# Allegro board ASR6601CB_FEM_TB_V10_240315.brd
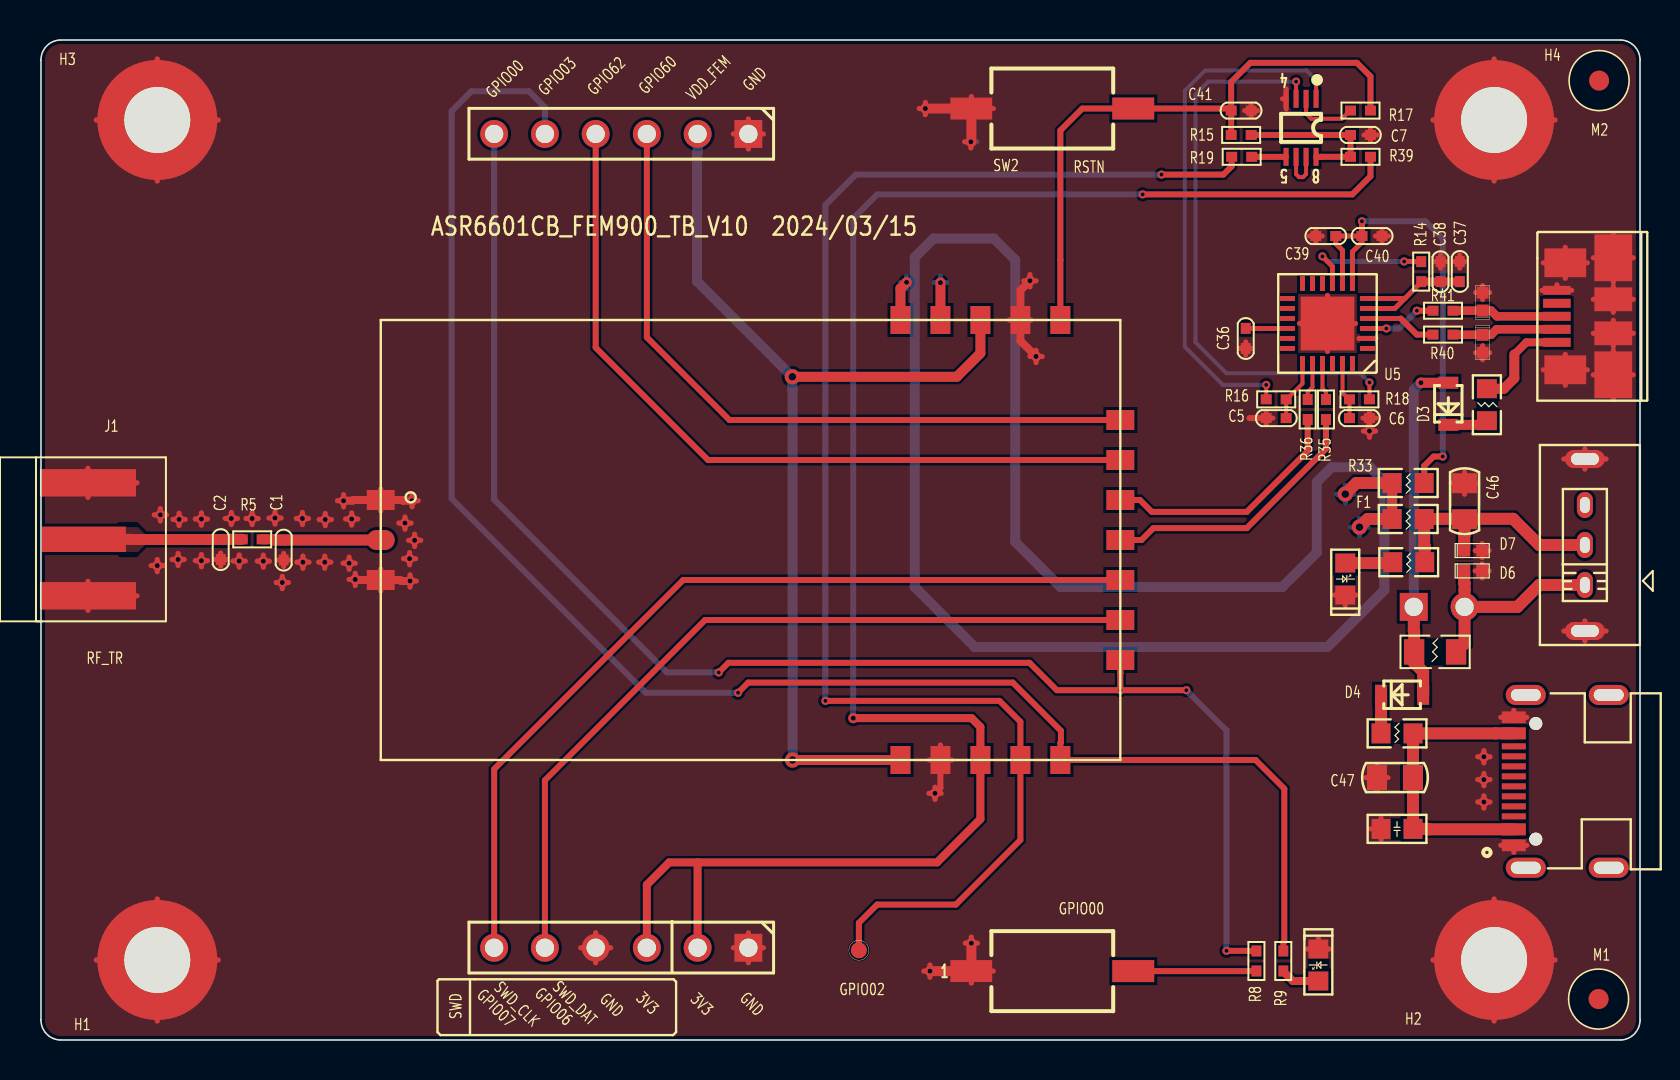
[diagram p0: board, top side]
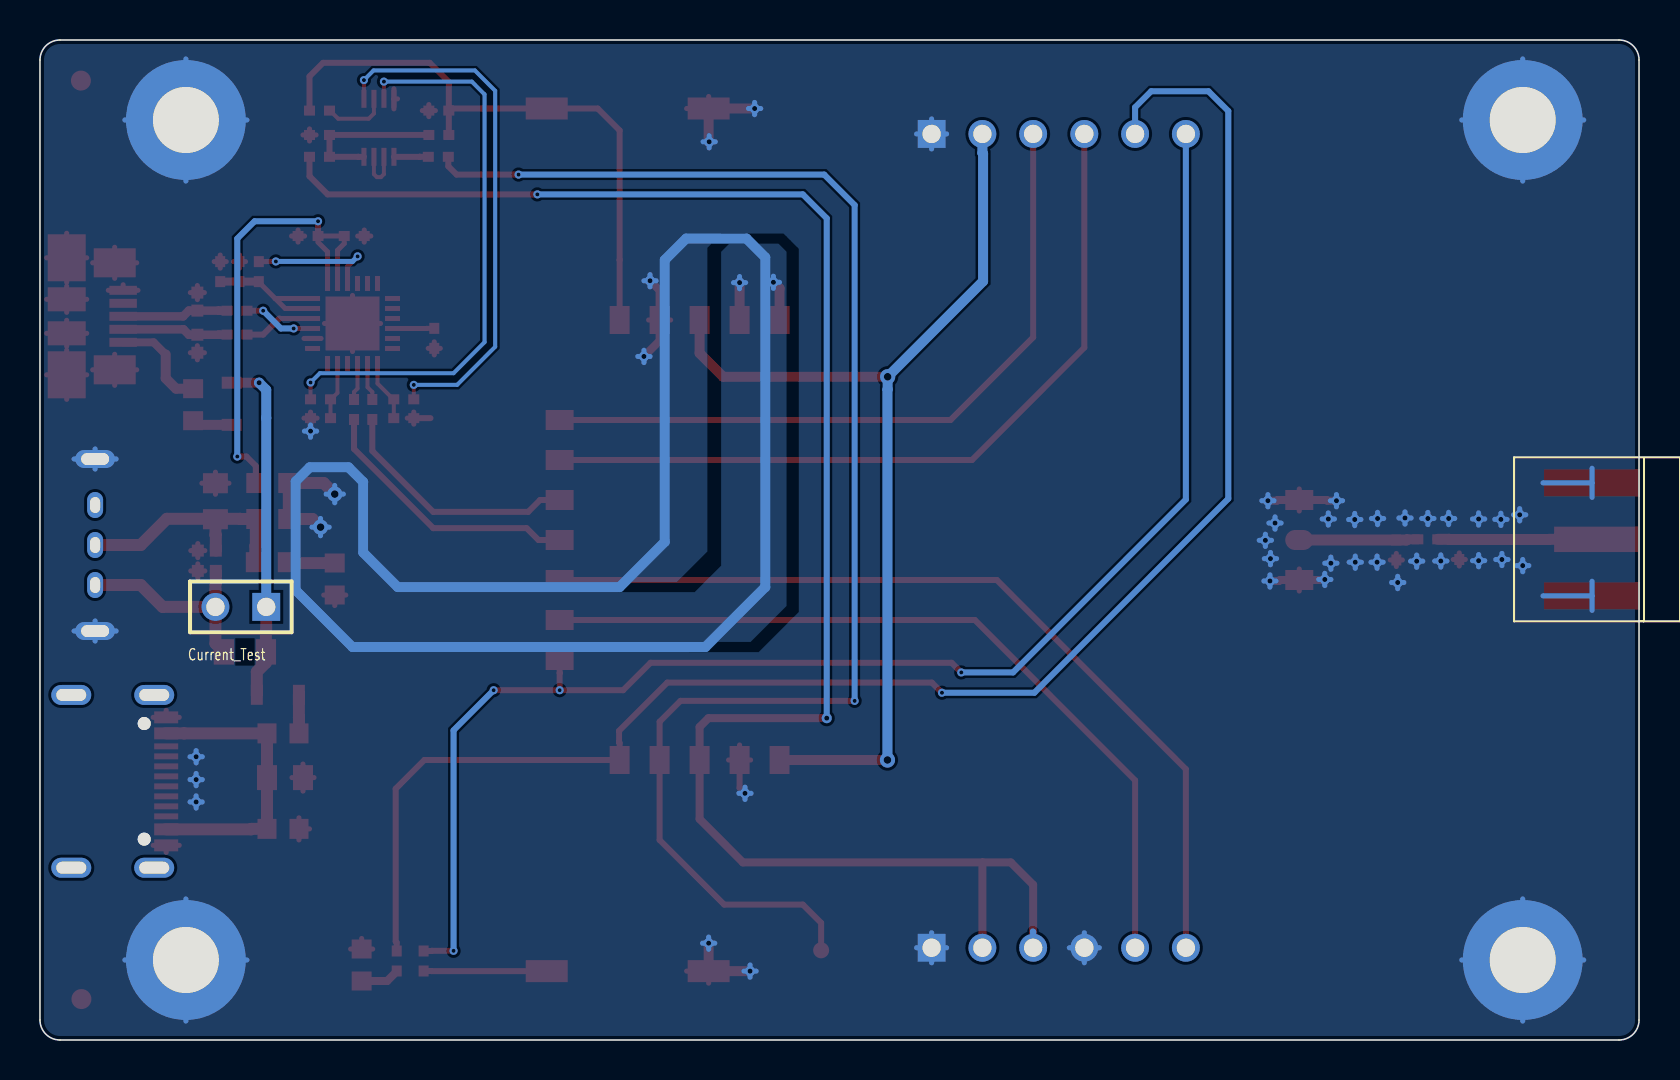
[diagram p1: board, bottom side, seen from below]

Outline 80 x 50 mm; copper layers: TOP, BOTTOM. Coordinates in mm from the lower left corner of the outline.
Outline path: 0,49 0,1 arc(0.29,0.29) 1,0 79,0 arc(79.71,0.29) 80,1 80,49 arc(79.71,49.71) 79,50 1,50 arc(0.29,49.71) 0,49

## Placement (name value [footprint] x y rotation side)
C1  NC  [C0402]  12.14 24.5 90 top
C2  NC  [C0402]  8.99 24.53 90 top
C5  0.1uF  [C0402]  61.8 31.09 180 top
C6  0.1uF  [C0402]  65.96 31.09 0 top
C7  0.1uF  [C0402]  66.01 45.25 0 top
C36  4.7uF  [C0402]  60.27 35.08 90 top
C37  0.1uF  [C0402]  70.98 38.42 270 top
C38  1uF  [C0402]  70.02 38.42 90 top
C39  0.1uF  [C0402]  64.28 40.2 180 top
C40  1uF  [C0402]  66.59 40.2 180 top
C41  10nF  [C0402]  60.05 46.47 0 top
C46  22uF  [C0805]  71.22 26.94 90 top
C47  47uF  [C0805]  67.74 13.12 180 top
C48  0.1uF  [C0603]  67.84 10.56 180 top
CN1  USB3_TYPEC  [CON_USB3_STC_SMD50P_12N_MM]  78.44 12.93 90 top
CN2  USB_Micro  [USB_MICRO_5N]  78.66 36.18 90 top
D1  ESD5301N  [DFN_100X60_2N_MM]  72.13 36.92 90 top
D2  ESD5301N  [DFN_100X60_2N_MM]  72.13 34.81 270 top
D3  1N5819WS  [SOD323]  70.41 31.81 270 top
D4  1N5819WS  [SOD323]  68.1 17.26 180 top
D5  LED_R  [D0603]  65.25 23.05 90 top
D6  ESD5411N  [DFN_100X60_2N_MM]  71.65 23.45 0 top
D7  ESD5411N  [DFN_100X60_2N_MM]  71.65 24.47 0 top
D8  LED_G  [D0603]  63.91 3.75 270 top
F1  FUSE/1000mA  [R0603]  68.4 26.05 180 top
F2  PTC FUSE  [R0805]  69.75 19.41 0 top
H1  D3.0,plated  [NC-PTH-3MM-6MM]  5.82 4 0 top
H2  D3.0,plated  [NC-PTH-3MM-6MM]  72.7 4 0 top
H3  D3.0,plated  [NC-PTH-3MM-6MM]  5.82 46 0 top
H4  D3.0,plated  [NC-PTH-3MM-6MM]  72.7 46 0 top
J1  SMA Edge Mount  [CON_SMA_1420X700_5N_MM]  2.15 25.03 180 top
J2  HDR  [ASR6601TB_2000X3600_20N_MM]  41 25 270 top
J4  HDR  [THT_SIP254P_6N_MM]  29.03 45.3 0 top
J5  HDR  [THT_SIP254P_6N_MM]  29.03 4.61 0 top
JP3  HDR2X1_THT  [THT_SIP254P_2N_MM]  69.95 21.66 90 bottom
M1  *TP_1MM  [FID-MARK-1MM]  77.93 2.05 0 top
M2  *TP_1MM  [FID-MARK-1MM]  77.95 47.97 0 top
R1  0.1R  [R0603]  72.34 31.76 270 top
R2  0.1R  [R0603]  67.84 15.33 0 top
R5  0R  [R0402]  10.57 25.03 180 top
R8  510R  [R0402]  62.15 3.95 270 top
R9  510R  [R0402]  60.81 3.95 270 top
R14  4.7K  [R0402]  69.05 38.42 270 top
R15  10K  [R0402]  60.05 45.25 180 top
R16  1K  [R0402]  61.8 32.03 0 top
R17  0R  [R0402]  66.01 46.47 0 top
R18  1K  [R0402]  65.96 32.03 180 top
R19  0R  [R0402]  60.07 44.16 0 top
R25  1K  [R0603]  68.43 23.89 180 top
R33  0R  [R0603]  68.4 27.85 180 top
R35  0R  [R0402]  64.29 31.53 270 top
R36  0R  [R0402]  63.37 31.53 270 top
R39  0R  [R0402]  66.01 44.16 0 top
R40  0R  [R0402]  70.14 35.27 180 top
R41  0R  [R0402]  70.14 36.46 180 top
SW1  SWK  [SW_SMT350X600_2N_MM]  50.6 3.44 0 top
SW2  SWK  [SW_SMT350X600_2N_MM]  50.6 46.57 0 top
SW4  Power Switch/DIP-5  [SW_SIP200P_860X470_5N_MM]  77.24 24.75 90 top
TP3  TP_3MM  [TP_SMD80C80_MM]  40.92 4.49 0 top
U5  CP2104  [QFN50P_400X400_24N_MM]  64.36 35.83 180 top
U8  NL37WZ14  [US50P_200X230_8N_MM]  63.04 45.61 180 top

## Library data of the parts
C1 C2 C5-C7 C36-C41 = RCL_CAP_NP
C46-C48 = CAP
CN1 = USB3_TYPEC_0
CN2 = CN_USB_MICRO_0
D1 D2 = TVS-UNI_1
D3 D4 = DIODE_1P2N
D5 = LED_2
D6 D7 = TVS-BI
D8 = LED_2P
F1 = FUSE
F2 = FUSE/SM_0
H1-H4 = HOLE
J1 = SMA_1
J2 = CN_6
J4 J5 = CN_7
JP3 = HEADER_2P_SIP
M1 M2 TP3 = TP_SMT
R1 R2 R5 R8 R9 R14-R19 R33 R35 R36 R39-R41 = RCL_RES
R25 = RES
SW1 SW2 = SW_B3S_0
SW4 = SW_3P_0
U5 = CP2104_0
U8 = NL37WZ14

## Footprints (pads in the part's own frame, mm; a bottom-side part is the same pattern mirrored in y, then rotated)
ASR6601TB_2000X3600_20N_MM
  rect 1x1.4 smd: 1(-2,-24) 3(2,-24) 9(6,13) 10(4,13) 11(2,13) 12(0,13) 13(-2,13) 14(-4,13) 15(-6,13)
  oval 1x1.4 smd: 2(0,-24)
  rect 1.4x1 smd: 4(11,2) 5(11,4) 6(11,6) 7(11,8) 8(11,10) 16(-11,10) 17(-11,8) 18(-11,6) 19(-11,4) 20(-11,2)
C0402
  rect 0.55x0.5 smd: 1(-0.5,0) 2(0.5,0)
C0603
  rect 0.95x1 smd: 1(-0.8,0) 2(0.8,0)
C0805
  rect 1x1.25 smd: 1(-0.9,0) 2(0.9,0)
CON_SMA_1420X700_5N_MM
  rect 4.2x1.27 smd: 1(0,0)
  rect 4.8x1.35 smd: 2(-0.2,2.825) 3(-0.2,2.825) 4(-0.2,-2.825) 5(-0.2,-2.825)
CON_USB3_STC_SMD50P_12N_MM
  oval 1x2 hole 0.6x1.5: (-4.32,4.15) (-4.32,0) (4.32,4.15) (4.32,0)
  round 0.65 hole 0.65 unplated: (-2.89,3.65) (2.89,3.65)
  rect 0.6x1.2 smd: A1B12(-3.2,4.75) A4B9(-2.4,4.75) B1A12(3.2,4.75) B4A9(2.4,4.75)
  rect 0.3x1.2 smd: A5(-1.25,4.75) A6(-0.25,4.75) A7(0.25,4.75) A8(1.25,4.75) B5(1.75,4.75) B6(0.75,4.75) B7(-0.75,4.75) B8(-1.75,4.75)
D0603
  rect 0.95x1 smd: 1(0.8,0) 2(-0.8,0)
DFN_100X60_2N_MM
  rect 0.6x0.6 smd: 1(-0.45,0) 2(0.45,0)
FID-MARK-1MM
  round 1 smd: 1(0,0)
NC-PTH-3MM-6MM
  round 6 hole 3.3: 1(0,0)
QFN50P_400X400_24N_MM
  rect 0.75x0.25 smd: 1(-2,1.25) 2(-2,0.75) 3(-2,0.25) 4(-2,-0.25) 5(-2,-0.75) 6(-2,-1.25) 13(2,-1.25) 14(2,-0.75) 15(2,-0.25) 16(2,0.25) 17(2,0.75) 18(2,1.25)
  rect 0.25x0.75 smd: 7(-1.25,-2) 8(-0.75,-2) 9(-0.25,-2) 10(0.25,-2) 11(0.75,-2) 12(1.25,-2) 19(1.25,2) 20(0.75,2) 21(0.25,2) 22(-0.25,2) 23(-0.75,2) 24(-1.25,2)
  rect 2.7x2.7 smd: 25(0,0)
R0402
  rect 0.55x0.5 smd: 1(-0.5,0) 2(0.5,0)
R0603
  rect 0.95x1 smd: 1(-0.8,0) 2(0.8,0)
R0805
  rect 1.016x1.27 smd: 1(-1.05,0) 2(1.05,0)
SOD323
  rect 0.6x1 smd: 1(1.053,0) 2(-1.053,0)
SW_SIP200P_860X470_5N_MM
  oval 1.3x0.8 hole 0.8x0.5: 1(-2,0) 2(0,0) 3(2,0)
  oval 0.9x2 hole 0.6x1.4: 4(-4.3,0) 5(4.3,0)
SW_SMT350X600_2N_MM
  rect 2.1x1.1 smd: 1(-4.05,0) 2(4.05,0)
THT_SIP254P_2N_MM
  rect 1.397x1.397 hole 0.914: 1(0,-1.27)
  round 1.397 hole 0.914: 2(0,1.27)
THT_SIP254P_6N_MM
  rect 1.397x1.397 hole 0.914: 1(6.36,0)
  round 1.397 hole 0.914: 2(3.82,0) 3(1.28,0) 4(-1.28,0) 5(-3.82,0) 6(-6.36,0)
TP_SMD80C80_MM
  round 0.8 smd: 1(0,0)
US50P_200X230_8N_MM
  rect 0.254x0.9 smd: 1(-0.75,-1.45) 2(-0.25,-1.45) 3(0.25,-1.45) 4(0.75,-1.45) 5(0.75,1.45) 6(0.25,1.45) 7(-0.25,1.45) 8(-0.75,1.45)
USB_MICRO_5N
  rect 0.45x1.38 smd: 1(-1.3,2.825) 2(-0.65,2.825) 3(0,2.825) 4(0.65,2.825) 5(1.3,2.825)
  rect 1.45x2.1 smd: 6(-2.675,2.402) 7(2.675,2.402)
  rect 2.35x1.9 smd: 8(-2.925,0) 9(2.925,0)
  rect 1.2x1.9 smd: 10(-0.85,0) 11(0.85,0)

## Nets
D3V3: C7.1 R15.1 R39.1 U8.8(VCC)
GND: C1.1 C2.1 C5.2 C6.2 C7.2 C36.1 C37.1 C38.2 C39.2 C40.1 C41.2 C46.2 C47.2 C48.2 CN1.A1B12(GND#A1B12) CN1.B1A12(GND#B1A12) CN2.5(GND#5) CN2.6(GND#6) CN2.7(GND#7) CN2.8(GND#8) CN2.9(GND#9) CN2.10(GND#10) CN2.11(GND#11) D1.2 D2.2 D5.2(C) D6.2 D7.2 D8.2(CATHODE) H1.1 H2.1 H3.1 H4.1 J1.2 J1.3 J1.4 J1.5 J2.1 J2.3 J2.5 J2.17 J4.1 J5.1 J5.4 SW1.1 SW2.1 SW4.4(GND#4) SW4.5(GND#5) U5.2(GND) U5.25(TP) U8.4(GND)
VBAT_IN: F1.2 J2.19 J2.20 R33.2
VBUS: C47.1 C48.1 CN1.A4B9(VBUS#A4B9) CN1.B4A9(VBUS#B4A9) R2.2
VBUS1: CN2.1(VBUS) R1.1
VCC_3V3: J2.6 J5.2 J5.3 R39.2
VDD_FEM: J2.4 J2.18 J4.2
DTR: C6.1 R18.2 U5.23(DTR)
GPIO00: J2.9 J4.6 R9.1
GPIO02: J2.7 R19.1 TP3.1(TP)
GPIO03: J2.8 J4.5 R8.1
GPIO06: J2.10 J5.5
GPIO07: J2.11 J5.6
GPIO16: J2.12 R35.2
GPIO17: J2.13 R36.2
GPIO60: J2.15 J4.3
GPIO62: J2.14 J4.4
RF_TR: C1.2 J2.2 R5.1
RSTN: C41.1 J2.16 R15.2 R17.2 SW2.2
RTS: C5.1 R16.2 U5.19(RTS)
UART_3.4V: C37.2 C38.1 R14.2 U5.5(VIO) U5.6(VDD)
UART_DM: R40.2 U5.4(D-)
UART_DP: R41.2 U5.3(D+)
USB1_5V0: D3.1(A) R1.2
USB2_5V0: D4.1(A) R2.1
USB_5V0: D6.1 F2.2 JP3.2 SW4.1(SW_1)
N16724515: C39.1 C40.2 R33.1 U5.7(REGIN) U5.8(VBUS)
N16724567: C36.2 U5.16(VPP)
N16724579: R14.1 U5.9(RST#)
N16724609: R35.1 U5.21(TXD)
N16724613: R36.1 U5.20(RXD)
N16787728: C46.1 D7.1 F1.1 R25.1 SW4.2(SW_2)
N16787748: D5.1(A) R25.2
N16834216: R16.1 U8.1(INA1)
N16834221: R18.1 U8.3(INA2)
N16834235: U8.6(INA3) U8.7(OUTY1N)
N16834244: R19.2 U8.5(OUTY2N)
N16834246: R17.1 U8.2(OUTY3N)
N16861799: CN2.2(D-) D2.1 R40.1
N16864731: D3.2(K) D4.2(K) F2.1 JP3.1
N16868673: R9.2 SW1.2
N16868745: D8.1(ANODE) R8.2
N16873648: C2.2 J1.1(RF) R5.2
N16877072: CN2.3(D+) D1.1 R41.1

Pads without a net: CN1 A5 A6 A7 A8 B5 B6 B7 B8; CN2 4; M1 1; M2 1; SW4 3; U5 1 10 11 12 13 14 15 17 18 22 24

## Via types
v1: diameter 0.508, hole 0.254, TOP to BOTTOM, 40 vias
v2: diameter 0.762, hole 0.381, TOP to BOTTOM, 4 vias
v3: diameter 0.406, hole 0.203, TOP to BOTTOM, 18 vias

## Routing (per net, layer and track width the routed paths; a pad name or vN(x,y) marks a point on that pad's centre or on a via; arc(x,y) is an arc through that point)
D3V3: length 7.8
  TOP w0.3: U8.8 64.07,44.16 64.07,44.16 R39.1 C7.1 R15.1
GND: length 323.2
  TOP w0.254: C5.2 61.62,31.09 ; C5.2 61.3,31.39 ; C5.2 61.3,30.79 ; v1(72.19,11.9) 72.19,12.21 ; v1(72.19,11.9) 71.88,11.9 ; v1(72.19,11.9) 72.19,11.6 ; v1(72.19,11.9) 72.49,11.9 ; SW4.4 77.24,20.95 ; SW4.4 77.24,19.95 ; SW4.4 78.29,20.45 ; SW4.4 76.19,20.45 ; 76.19,29.05 SW4.5 ; SW4.5 78.29,29.05 ; SW4.5 77.24,29.55 ; SW4.5 77.24,28.55 ; 18.47,22.65 v1(18.47,22.95) ; v1(18.47,22.95) 18.77,22.95 ; v1(18.47,22.95) 18.47,23.26 ; 69.72,38.92 C38.2 ; C38.2 70.02,39.25 ; C38.2 70.02,38.59 ; C38.2 70.32,38.92 ; 72.1,23.1 D6.2 ; D6.2 72.45,23.45 ; D6.2 71.75,23.45 ; D6.2 72.1,23.81 ; 18.21,25.54 v1(18.21,25.85) ; v1(18.21,25.85) 18.52,25.85 ; v1(18.21,25.85) 18.21,26.15 ; v1(18.21,25.85) 17.91,25.85 ; 64.7,22.25 D5.2 ; D5.2 65.8,22.25 ; D5.2 65.25,21.72 ; v1(44.73,12.33) 44.73,12.64 ; v1(44.73,12.33) 44.42,12.33 ; v1(44.73,12.33) 44.73,12.03 ; v1(44.73,12.33) 45.03,12.33 ; 72.7,42.95 H4.1 ; H4.1 72.7,49.05 ; H4.1 69.65,46 ; H4.1 75.75,46 ; v1(18.44,24.07) 18.44,24.37 ; v1(18.44,24.07) 18.44,23.76 ; v1(18.44,24.07) 18.75,24.07 ; v1(18.44,24.07) 18.14,24.07 ; v1(15.54,26.05) 15.54,26.35 ; v1(15.54,26.05) 15.85,26.05 ; v1(15.54,26.05) 15.54,25.74 ; v1(15.54,26.05) 15.24,26.05 ; 71.88,14.16 v1(72.19,14.16) ; v1(72.19,14.16) 72.19,14.47 ; v1(72.19,14.16) 72.19,13.86 ; v1(72.19,14.16) 72.49,14.16 ; C6.2 66.46,31.39 ; C6.2 66.14,31.09 ; C6.2 66.79,31.09 ; 2.35,27.13 J1.4 ; J1.4 4.8,27.86 ; J1.4 2.35,28.58 ; 27,4.61 J5.4 ; J5.4 27.75,3.86 ; J5.4 28.5,4.61 ; J5.4 27.75,5.36 ; 66.16,30.44 v1(66.46,30.44) ; v1(66.46,30.44) 66.77,30.44 ; v1(66.46,30.44) 66.46,30.14 ; 46.55,2.84 SW1.1 47.65,3.44 ; C36.1 60.27,34.91 ; C36.1 60.27,34.26 ; C36.1 59.97,34.58 ; C36.1 60.58,34.58 ; v1(49.78,34.18) 50.09,34.18 ; v1(49.78,34.18) 49.78,34.48 ; v1(49.78,34.18) 49.78,33.87 ; v1(49.78,34.18) 49.48,34.18 ; 70.55,27.84 C46.2 ; C46.2 71.22,27.29 ; C46.2 71.22,28.39 ; C46.2 71.9,27.84 ; 10.26,26.07 v1(10.57,26.07) ; v1(10.57,26.07) 10.57,26.38 ; v1(10.57,26.07) 10.57,25.77 ; v1(10.57,26.07) 10.87,26.07 ; 14.22,25.72 v1(14.22,26.02) ; v1(14.22,26.02) 13.92,26.02 ; v1(14.22,26.02) 14.22,26.33 ; v1(14.22,26.02) 14.53,26.02 ; 72.13,34.01 D2.2 ; D2.2 72.48,34.36 ; D2.2 72.13,34.71 ; D2.2 71.77,34.36 ; 15.14,26.66 v1(15.14,26.96) ; v1(15.14,26.96) 14.83,26.96 ; v1(15.14,26.96) 15.14,27.27 ; 5.82,42.95 H3.1 ; H3.1 5.82,49.05 ; H3.1 2.77,46 ; H3.1 8.87,46 ; 12.07,22.57 v1(12.07,22.87) ; v1(12.07,22.87) 11.77,22.87 ; v1(12.07,22.87) 12.07,23.18 ; v1(12.07,22.87) 12.38,22.87 ; 6.56,24.02 v1(6.86,24.02) ; v1(6.86,24.02) 7.17,24.02 ; v1(6.86,24.02) 6.86,24.33 ; v1(6.86,24.02) 6.86,23.72 ; v1(13.11,23.89) 13.11,24.2 ; v1(13.11,23.89) 13.41,23.89 ; v1(13.11,23.89) 12.8,23.89 ; v1(13.11,23.89) 13.11,23.59 ; 11.13,23.64 v1(11.13,23.94) ; v1(11.13,23.94) 11.43,23.94 ; v1(11.13,23.94) 10.82,23.94 ; v1(11.13,23.94) 11.13,24.25 ; J2.5 45,14.75 ; J2.5 44.45,14 ; J2.5 45.55,14 ; 65.94,35.08 U5.2 66.79,35.08 ; H1.1 8.87,4 ; H1.1 2.77,4 ; H1.1 5.82,0.95 ; H1.1 5.82,7.05 ; 11.71,25.8 v1(11.71,26.1) ; v1(11.71,26.1) 11.4,26.1 ; v1(11.71,26.1) 12.01,26.1 ; v1(11.71,26.1) 11.71,26.41 ; 76.26,32.73 CN2.6 ; CN2.6 77.36,33.51 ; CN2.6 76.26,34.29 ; CN2.6 75.16,33.51 ; 72.13,37.02 D1.2 ; D1.2 71.77,37.37 ; D1.2 72.13,37.72 ; D1.2 72.48,37.37 ; v1(8.03,23.97) 8.33,23.97 ; v1(8.03,23.97) 7.72,23.97 ; v1(8.03,23.97) 8.03,24.27 ; v1(8.03,23.97) 8.03,23.66 ; 64.36,34.43 U5.25 ; U5.25 62.96,35.83 ; U5.25 65.76,35.83 ; U5.25 64.36,37.23 ; 46.22,44.91 v1(46.52,44.91) ; v1(46.52,44.91) 46.52,45.22 ; v1(46.52,44.91) 46.52,44.61 ; v1(72.19,13.02) 72.49,13.02 ; v1(72.19,13.02) 72.19,12.71 ; v1(72.19,13.02) 71.88,13.02 ; v1(72.19,13.02) 72.19,13.32 ; D7.2 72.45,24.47 ; D7.2 72.1,24.82 ; D7.2 71.75,24.47 ; D7.2 72.1,24.12 ; C41.2 60.55,46.77 ; C41.2 60.55,46.17 ; C41.2 60.87,46.47 ; C41.2 60.22,46.47 ; C1.1 12.44,24 ; C1.1 12.14,23.67 ; C1.1 11.84,24 ; C1.1 12.14,24.33 ; 7.72,26.05 v1(8.03,26.05) ; v1(8.03,26.05) 8.03,26.35 ; v1(8.03,26.05) 8.03,25.74 ; v1(8.03,26.05) 8.33,26.05 ; J5.1 35.39,5.36 ; J5.1 36.14,4.61 ; J5.1 34.64,4.61 ; J5.1 35.39,3.86 ; CN2.7 77.36,38.86 ; CN2.7 76.26,39.64 ; CN2.7 75.16,38.86 ; CN2.7 76.26,38.08 ; D8.2 64.46,4.55 ; D8.2 63.91,5.07 ; D8.2 63.36,4.55 ; 17,26.45 J2.1 17,27.55 ; 62.29,46.56 U8.4 ; U8.4 62.29,47.56 ; U8.4 62.11,47.06 ; C7.2 66.51,45.55 ; C7.2 66.84,45.25 ; C7.2 66.51,44.95 ; C7.2 66.19,45.25 ; CN2.9 78.66,40.34 ; CN2.9 79.66,39.11 ; CN2.9 77.66,39.11 ; CN2.9 78.66,37.88 ; 77.66,37.03 CN2.11 ; CN2.11 78.66,37.69 ; CN2.11 78.66,36.38 ; CN2.11 79.66,37.03 ; v1(15.72,23.03) 15.72,23.33 ; v1(15.72,23.03) 15.72,22.72 ; v1(15.72,23.03) 16.03,23.03 ; v1(15.72,23.03) 15.42,23.03 ; v1(14.2,23.89) 14.2,24.2 ; v1(14.2,23.89) 13.89,23.89 ; v1(14.2,23.89) 14.2,23.59 ; v1(14.2,23.89) 14.5,23.89 ; v1(13.08,26.07) 13.08,26.38 ; v1(13.08,26.07) 12.78,26.07 ; v1(13.08,26.07) 13.39,26.07 ; v1(13.08,26.07) 13.08,25.77 ; 67.09,39.9 C40.1 ; C40.1 67.41,40.2 ; C40.1 66.76,40.2 ; C40.1 67.09,40.5 ; 72.7,0.95 H2.1 ; H2.1 69.65,4 ; H2.1 72.7,7.05 ; H2.1 75.75,4 ; v1(5.82,23.72) 5.82,24.02 ; v1(5.82,23.72) 5.51,23.72 ; v1(5.82,23.72) 5.82,23.41 ; v1(5.82,23.72) 6.12,23.72 ; v1(5.97,26.26) 5.97,26.57 ; v1(5.97,26.26) 6.28,26.26 ; v1(5.97,26.26) 5.97,25.95 ; v1(5.97,26.26) 5.67,26.26 ; 15.11,23.84 v1(15.42,23.84) ; v1(15.42,23.84) 15.72,23.84 ; v1(15.42,23.84) 15.42,23.53 ; v1(15.42,23.84) 15.42,24.14 ; 78.66,32.03 CN2.8 ; CN2.8 79.66,33.26 ; CN2.8 78.66,34.48 ; CN2.8 77.66,33.26 ; 73.03,9.73 CN1.A1B12 ; CN1.A1B12 74.34,9.73 ; CN1.A1B12 73.69,9.38 ; v1(46.55,4.84) 46.85,4.84 ; v1(46.55,4.84) 46.24,4.84 ; v1(46.55,4.84) 46.55,5.15 ; CN2.5 76.58,37.48 ; CN2.5 75.84,37.76 ; CN2.5 75.1,37.48 ; 8.99,23.7 C2.1 ; C2.1 8.99,24.35 ; C2.1 8.69,24.03 ; C2.1 9.29,24.03 ; v1(18.69,24.98) 19,24.98 ; v1(18.69,24.98) 18.69,24.68 ; v1(18.69,24.98) 18.39,24.98 ; v1(18.69,24.98) 18.69,25.29 ; v1(6.91,26.03) 7.22,26.03 ; v1(6.91,26.03) 6.61,26.03 ; v1(6.91,26.03) 6.91,25.73 ; v1(6.91,26.03) 6.91,26.34 ; v1(9.53,26.07) 9.83,26.07 ; v1(9.53,26.07) 9.53,26.38 ; v1(9.53,26.07) 9.53,25.77 ; v1(9.53,26.07) 9.22,26.07 ; J4.1 36.14,45.3 ; J4.1 35.39,44.55 ; J4.1 35.39,46.05 ; J4.1 34.64,45.3 ; 9.92,23.64 v1(9.92,23.95) ; v1(9.92,23.95) 9.92,24.25 ; v1(9.92,23.95) 9.61,23.95 ; v1(9.92,23.95) 10.22,23.95 ; v1(44.25,46.57) 44.25,46.88 ; v1(44.25,46.57) 44.25,46.27 ; v1(44.25,46.57) 43.94,46.57 ; 63.45,40.2 C39.2 ; C39.2 63.78,39.9 ; C39.2 64.1,40.2 ; C39.2 63.78,40.5 ; CN2.10 78.66,35.99 ; CN2.10 77.66,35.33 ; CN2.10 79.66,35.33 ; CN2.10 78.66,34.68 ; 66.84,12.45 C47.2 ; C47.2 66.29,13.12 ; C47.2 67.39,13.12 ; C47.2 66.84,13.8 ; 44.48,3.14 v1(44.48,3.44) ; v1(44.48,3.44) 44.17,3.44 ; v1(44.48,3.44) 44.48,3.75 ; v1(18.57,26.96) 18.87,26.96 ; v1(18.57,26.96) 18.57,27.27 ; v1(18.57,26.96) 18.57,26.66 ; 70.68,38.92 C37.1 ; C37.1 70.98,39.25 ; C37.1 71.28,38.92 ; C37.1 70.98,38.59 ; v1(49.48,37.96) 49.48,38.27 ; v1(49.48,37.96) 49.17,37.96 ; v1(49.48,37.96) 49.78,37.96 ; v1(49.48,37.96) 49.48,37.66 ; 2.35,21.48 2.35,22.21 ; 2.35,22.21 2.35,22.93 ; 2.35,22.21 4.8,22.21 ; CN1.B1A12 73.69,16.48 ; CN1.B1A12 73.03,16.13 ; CN1.B1A12 74.34,16.13 ; 49.55,36 J2.17 48.45,36 ; 67.04,10 C48.2 ; C48.2 67.04,11.11 ; C48.2 66.52,10.56 ; 47.65,46.57 SW2.1 46.55,47.17 ; 17,23.55 J2.3 17,22.45
  TOP w0.3: v1(44.73,12.33) 45,12.6 J2.5 ; 60.46,31.09 C5.2 ; v1(66.46,30.44) C6.2
  TOP w0.4: v1(15.14,26.96) 15.59,26.96 15.63,27 J2.1 18.08,27 18.11,26.96 v1(18.57,26.96) ; v1(49.48,37.96) 49,37.48 J2.17 49,34.96 v1(49.78,34.18) ; v1(18.47,22.95) 18.01,22.95 17.96,23 J2.3 15.75,23 v1(15.72,23.03)
  TOP w0.5: v1(44.48,3.44) SW1.1 v1(46.55,4.84) ; v1(46.52,44.91) 46.55,44.91 SW2.1 v1(44.25,46.57)
  BOTTOM w0.254: v1(15.72,23.03) 15.72,23.33 ; v1(15.72,23.03) 15.42,23.03 ; v1(15.72,23.03) 15.72,22.72 ; v1(15.72,23.03) 16.03,23.03 ; v1(46.55,4.84) 46.55,5.15 ; v1(46.55,4.84) 46.24,4.84 ; v1(46.55,4.84) 46.55,4.54 ; v1(46.55,4.84) 46.85,4.84 ; 12.78,26.07 v1(13.08,26.07) ; v1(13.08,26.07) 13.08,26.38 ; v1(13.08,26.07) 13.39,26.07 ; v1(13.08,26.07) 13.08,25.77 ; 49.48,34.18 v1(49.78,34.18) ; v1(49.78,34.18) 49.78,33.87 ; v1(49.78,34.18) 50.09,34.18 ; v1(49.78,34.18) 49.78,34.48 ; v1(14.2,23.89) 14.2,24.2 ; v1(14.2,23.89) 14.2,23.59 ; v1(14.2,23.89) 14.5,23.89 ; v1(14.2,23.89) 13.89,23.89 ; 11.4,26.1 v1(11.71,26.1) ; v1(11.71,26.1) 12.01,26.1 ; v1(11.71,26.1) 11.71,25.8 ; v1(11.71,26.1) 11.71,26.41 ; v1(44.73,12.33) 45.03,12.33 ; v1(44.73,12.33) 44.73,12.03 ; v1(44.73,12.33) 44.42,12.33 ; v1(44.73,12.33) 44.73,12.64 ; v1(72.19,13.02) 72.19,13.32 ; v1(72.19,13.02) 72.49,13.02 ; v1(72.19,13.02) 71.88,13.02 ; v1(72.19,13.02) 72.19,12.71 ; 49.48,37.66 v1(49.48,37.96) ; v1(49.48,37.96) 49.17,37.96 ; v1(49.48,37.96) 49.48,38.27 ; v1(49.48,37.96) 49.78,37.96 ; 6.61,26.03 v1(6.91,26.03) ; v1(6.91,26.03) 6.91,26.34 ; v1(6.91,26.03) 7.22,26.03 ; v1(6.91,26.03) 6.91,25.73 ; 10.26,26.07 v1(10.57,26.07) ; v1(10.57,26.07) 10.57,25.77 ; v1(10.57,26.07) 10.87,26.07 ; v1(10.57,26.07) 10.57,26.38 ; v1(9.53,26.07) 9.53,26.38 ; v1(9.53,26.07) 9.53,25.77 ; v1(9.53,26.07) 9.22,26.07 ; v1(9.53,26.07) 9.83,26.07 ; 2.35,22.21 2.35,22.93 ; 2.35,22.21 4.8,22.21 ; 2.35,22.21 2.35,21.48 ; 35.39,3.86 J5.1 ; J5.1 35.39,5.36 ; J5.1 36.14,4.61 ; J5.1 34.64,4.61 ; 12.8,23.89 v1(13.11,23.89) ; v1(13.11,23.89) 13.11,24.2 ; v1(13.11,23.89) 13.41,23.89 ; v1(13.11,23.89) 13.11,23.59 ; 8.03,23.66 v1(8.03,23.97) ; v1(8.03,23.97) 8.03,24.27 ; v1(8.03,23.97) 8.33,23.97 ; v1(8.03,23.97) 7.72,23.97 ; 34.64,45.3 J4.1 ; J4.1 35.39,44.55 ; J4.1 36.14,45.3 ; J4.1 35.39,46.05 ; v1(15.14,26.96) 15.14,27.27 ; v1(15.14,26.96) 15.14,26.66 ; v1(15.14,26.96) 14.83,26.96 ; v1(15.14,26.96) 15.44,26.96 ; 69.65,4 H2.1 ; H2.1 72.7,0.95 ; H2.1 72.7,7.05 ; H2.1 75.75,4 ; 17.91,25.85 v1(18.21,25.85) ; v1(18.21,25.85) 18.21,25.54 ; v1(18.21,25.85) 18.21,26.15 ; v1(18.21,25.85) 18.52,25.85 ; 71.88,14.16 v1(72.19,14.16) ; v1(72.19,14.16) 72.19,13.86 ; v1(72.19,14.16) 72.49,14.16 ; v1(72.19,14.16) 72.19,14.47 ; v1(8.03,26.05) 8.03,26.35 ; v1(8.03,26.05) 8.33,26.05 ; v1(8.03,26.05) 8.03,25.74 ; v1(8.03,26.05) 7.72,26.05 ; 5.97,25.95 v1(5.97,26.26) ; v1(5.97,26.26) 5.67,26.26 ; v1(5.97,26.26) 5.97,26.57 ; v1(5.97,26.26) 6.28,26.26 ; 76.19,29.05 SW4.5 ; SW4.5 77.24,29.55 ; SW4.5 77.24,28.55 ; SW4.5 78.29,29.05 ; v1(15.54,26.05) 15.54,26.35 ; v1(15.54,26.05) 15.54,25.74 ; v1(15.54,26.05) 15.85,26.05 ; v1(15.54,26.05) 15.24,26.05 ; H4.1 72.7,49.05 ; H4.1 72.7,42.95 ; H4.1 75.75,46 ; H4.1 69.65,46 ; 14.22,25.72 v1(14.22,26.02) ; v1(14.22,26.02) 13.92,26.02 ; v1(14.22,26.02) 14.53,26.02 ; v1(14.22,26.02) 14.22,26.33 ; v1(5.82,23.72) 6.12,23.72 ; v1(5.82,23.72) 5.82,24.02 ; v1(5.82,23.72) 5.51,23.72 ; v1(5.82,23.72) 5.82,23.41 ; v1(11.13,23.94) 11.13,24.25 ; v1(11.13,23.94) 11.13,23.64 ; v1(11.13,23.94) 10.82,23.94 ; v1(11.13,23.94) 11.43,23.94 ; 9.92,23.64 v1(9.92,23.95) ; v1(9.92,23.95) 9.92,24.25 ; v1(9.92,23.95) 9.61,23.95 ; v1(9.92,23.95) 10.22,23.95 ; 18.57,26.66 v1(18.57,26.96) ; v1(18.57,26.96) 18.87,26.96 ; v1(18.57,26.96) 18.26,26.96 ; v1(18.57,26.96) 18.57,27.27 ; J1.4 2.35,28.58 ; J1.4 2.35,27.13 ; J1.4 4.8,27.86 ; 66.46,30.14 v1(66.46,30.44) ; v1(66.46,30.44) 66.16,30.44 ; v1(66.46,30.44) 66.77,30.44 ; v1(66.46,30.44) 66.46,30.75 ; 5.82,42.95 H3.1 ; H3.1 8.87,46 ; H3.1 2.77,46 ; H3.1 5.82,49.05 ; 44.25,46.27 v1(44.25,46.57) ; v1(44.25,46.57) 43.94,46.57 ; v1(44.25,46.57) 44.55,46.57 ; v1(44.25,46.57) 44.25,46.88 ; 15.11,23.84 v1(15.42,23.84) ; v1(15.42,23.84) 15.72,23.84 ; v1(15.42,23.84) 15.42,24.14 ; v1(15.42,23.84) 15.42,23.53 ; 5.82,0.95 H1.1 ; H1.1 5.82,7.05 ; H1.1 8.87,4 ; H1.1 2.77,4 ; 77.24,19.95 SW4.4 ; SW4.4 77.24,20.95 ; SW4.4 78.29,20.45 ; SW4.4 76.19,20.45 ; v1(44.48,3.44) 44.78,3.44 ; v1(44.48,3.44) 44.48,3.14 ; v1(44.48,3.44) 44.17,3.44 ; v1(44.48,3.44) 44.48,3.75 ; J5.4 27.75,5.36 ; J5.4 27,4.61 ; J5.4 28.5,4.61 ; J5.4 27.75,3.86 ; 18.16,22.95 v1(18.47,22.95) ; v1(18.47,22.95) 18.47,23.26 ; v1(18.47,22.95) 18.47,22.65 ; v1(18.47,22.95) 18.77,22.95 ; v1(46.52,44.91) 46.52,45.22 ; v1(46.52,44.91) 46.83,44.91 ; v1(46.52,44.91) 46.22,44.91 ; v1(46.52,44.91) 46.52,44.61 ; 18.69,24.68 v1(18.69,24.98) ; v1(18.69,24.98) 19,24.98 ; v1(18.69,24.98) 18.39,24.98 ; v1(18.69,24.98) 18.69,25.29 ; 18.14,24.07 v1(18.44,24.07) ; v1(18.44,24.07) 18.44,23.76 ; v1(18.44,24.07) 18.44,24.37 ; v1(18.44,24.07) 18.75,24.07 ; 11.77,22.87 v1(12.07,22.87) ; v1(12.07,22.87) 12.38,22.87 ; v1(12.07,22.87) 12.07,23.18 ; v1(12.07,22.87) 12.07,22.57 ; v1(6.86,24.02) 6.86,24.33 ; v1(6.86,24.02) 6.56,24.02 ; v1(6.86,24.02) 6.86,23.72 ; v1(6.86,24.02) 7.17,24.02 ; v1(72.19,11.9) 72.19,12.21 ; v1(72.19,11.9) 71.88,11.9 ; v1(72.19,11.9) 72.49,11.9 ; v1(72.19,11.9) 72.19,11.6
VBAT_IN: length 16
  TOP w0.5: J2.20 43,37.58 v1(43.31,37.89) ; R33.2 F1.2 ; J2.19 v1(45,37.87)
  TOP w0.6: R33.2 65.81,27.85 v2(65.25,27.29) ; v2(65.96,25.64) 66.37,26.05 F1.2
  BOTTOM w0.254: 65.96,25.21 v2(65.96,25.64) ; v2(65.96,25.64) 65.53,25.64 ; v2(65.96,25.64) 65.96,26.08 ; v2(65.96,25.64) 66.4,25.64 ; v1(45,37.87) 45.3,37.87 ; v1(45,37.87) 44.7,37.87 ; v1(45,37.87) 45,38.17 ; v1(45,37.87) 45,37.56 ; 43.31,37.58 v1(43.31,37.89) ; v1(43.31,37.89) 43,37.89 ; v1(43.31,37.89) 43.61,37.89 ; v1(43.31,37.89) 43.31,38.19 ; v2(65.25,27.29) 65.68,27.29 ; v2(65.25,27.29) 64.82,27.29 ; v2(65.25,27.29) 65.25,27.73 ; v2(65.25,27.29) 65.25,26.86
VBUS: length 14.9
  TOP w0.6: CN1.A4B9 69.44,10.53 69.42,10.56 C48.1 68.64,12.19 68.64,12.2 C47.1 68.64,14.05 68.64,14.05 R2.2 72.78,15.33 72.79,15.33 CN1.B4A9
VBUS1: length 5.2
  TOP w0.4: CN2.1 74.32,34.88 73.71,34.28
  TOP w0.5: R1.1 73.19,32.56 73.71,33.09 73.71,34.28
VCC_3V3: length 90.1
  TOP w0.3: v3(55.12,42.28) 65.61,42.28 66.51,43.19 R39.2
  TOP w0.4: J5.2 32.85,8.87 32.84,8.88 ; 32.84,8.88 31.43,8.88 30.31,7.76 J5.3 ; 32.84,8.88 44.83,8.88 47,11.05 J2.6 47,15.65 46.56,16.09 v1(40.64,16.09)
  BOTTOM w0.3: 30.33,5.43 30.31,5.41 J5.3 ; v1(40.64,16.09) 40.64,41.09 41.83,42.28 v3(55.12,42.28)
VDD_FEM: length 50.3
  TOP w0.5: J2.18 47,34.34 45.82,33.16 v2(37.59,33.16) ; J2.4 v2(37.6,14)
  BOTTOM w0.5: v2(37.6,14) 37.6,32.52 37.59,32.53 v2(37.59,33.16) 32.82,37.94 32.82,44.32 32.85,44.35 J4.2
DTR: length 2.9
  TOP w0.2: C6.1 R18.2 65.44,32.03 65.12,32.35 65.12,33.67 65.11,33.67 U5.23
GPIO00: length 74.1
  TOP w0.3: v3(54,17.49) 54,18.35 J2.9 ; v3(54,17.49) v3(57.3,17.49) ; v3(54,17.49) 50.83,17.49 49.45,18.86 34.39,18.86 v3(33.91,18.38) ; R9.1 60.41,4.45 60.4,4.46 v3(59.31,4.46)
  BOTTOM w0.3: v3(33.91,18.38) 31.32,18.38 22.67,27.02 J4.6 ; v3(57.3,17.49) 59.31,15.48 v3(59.31,4.46)
GPIO02: length 73.7
  TOP w0.3: v3(56.06,43.27) 59.16,43.27 59.57,43.69 R19.1 ; v3(39.24,16.96) 47.96,16.96 49,15.91 J2.7 49,10 45.77,6.77 41.83,6.77 40.92,5.86 TP3.1
  BOTTOM w0.3: v3(56.06,43.27) 40.77,43.27 39.24,41.75 v3(39.24,16.96)
GPIO03: length 83.2
  TOP w0.3: R8.1 62.15,4.88 62.2,4.93 62.2,12.56 60.77,14 J2.8 51,14.85 51.03,14.88 51.03,15.46 48.62,17.87 35.38,17.87 v3(34.87,17.36)
  BOTTOM w0.3: J4.5 25.21,46.63 24.41,47.44 21.54,47.44 20.55,46.45 20.55,27.07 30.25,17.36 v3(34.87,17.36)
GPIO06: length 40.5
  TOP w0.3: J2.10 33.23,21 25.21,12.98 J5.5
GPIO07: length 44.2
  TOP w0.3: J5.6 22.67,13.54 32.13,23 J2.11
GPIO16: length 13.6
  TOP w0.3: J2.12 55.06,25 55.65,25.59 60.33,25.59 64.29,29.55 R35.2
GPIO17: length 12.5
  TOP w0.3: R36.2 63.37,29.45 60.33,26.41 55.58,26.41 54.98,27 J2.13
GPIO60: length 35.6
  TOP w0.3: J2.15 34.45,31 30.31,35.13 J4.3
GPIO62: length 39.3
  TOP w0.3: J2.14 33.37,29 27.75,34.62 J4.4
RF_TR: length 6.9
  TOP w0.5: 12.64,25 C1.2 11.63,25 11.59,25.03 R5.1
  TOP w0.55: J2.2 11.64,25
RSTN: length 30.8
  TOP w0.3: 59.37,46.57 59.55,46.4 ; 59.37,46.57 SW2.2 52.1,46.57 51,45.48 J2.16 ; 59.37,46.57 59.44,46.57 C41.1 ; 59.55,46.4 C41.1 ; 59.55,46.4 R15.2 ; R17.2 66.51,48.18 65.84,48.86 60.5,48.86 59.55,47.9 C41.1
RTS: length 3.1
  TOP w0.2: C5.1 R16.2 62.32,32.03 63.11,32.82 U5.19
UART_3.4V: length 7.1
  TOP w0.25: 68.23,37.08 69.05,37.89 R14.2 ; 68.23,37.08 U5.6 ; 68.23,37.08 67.73,36.58 U5.5
  TOP w0.4: R14.2 C38.1 C37.2
UART_DM: length 3.6
  TOP w0.25: 68.03,36.08 U5.4
  TOP w0.3: R40.2 68.83,35.27 68.03,36.08
UART_DP: length 3.6
  TOP w0.25: U5.3 v3(67.31,35.58)
  TOP w0.3: v3(68.83,36.46) R41.2
  BOTTOM w0.3: v3(68.83,36.46) 67.95,35.58 v3(67.31,35.58)
USB1_5V0: length 2
  TOP w0.5: D3.1 72.13,30.76 R1.2
USB2_5V0: length 1.9
  TOP w0.6: D4.1 67.04,16.13 67.04,16.13 R2.1
USB_5V0: length 11.1
  TOP w0.5: 71.2,22.85 71.2,22.52 71.22,22.5
  TOP w0.6: JP3.2 73.86,21.66 74.96,22.75 SW4.1 ; JP3.2 71.22,19.83 F2.2 ; JP3.2 71.22,22.84 71.2,22.85 D6.1
N16724515: length 24.4
  TOP w0.25: U5.8 65.11,39.49 64.78,39.82 C39.1 C40.2 66.09,39.89 65.61,39.42 U5.7
  TOP w0.3: C40.2 v3(66.09,40.94) ; v3(70.13,29.17) 69.67,29.17 69.2,28.7 R33.1
  BOTTOM w0.3: v3(70.13,29.17) 70.13,40.07 69.26,40.94 v3(66.09,40.94)
N16724567: length 2.1
  TOP w0.25: C36.2 60.65,35.58 60.65,35.58 U5.16
N16724579: length 6.6
  TOP w0.25: R14.1 68.68,38.92 68.67,38.93 v3(68.2,38.93) ; v3(64.11,39.18) 64.61,38.68 U5.9
  BOTTOM w0.25: v3(64.11,39.18) 64.36,38.93 v3(68.2,38.93)
N16724609: length 1.9
  TOP w0.2: U5.21 64.11,32.57 64.29,32.4 R35.1
N16724613: length 1.9
  TOP w0.2: R36.1 63.37,32.4 63.61,32.64 U5.20
N16787728: length 12.4
  TOP w0.6: 71.22,26.06 73.65,26.06 74.96,24.75 SW4.2 ; 71.22,26.06 C46.1 71.22,25.26 71.2,25.24 D7.1 ; 71.22,26.06 69.99,26.06 69.98,26.05 F1.1 69.2,24.72 69.23,24.69 R25.1
N16787748: length 2.4
  TOP w0.6: R25.2 67.58,23.85 D5.1
N16834216: length 26.5
  TOP w0.2: R16.1 v3(61.3,32.76) ; U8.1 v3(63.79,48)
  BOTTOM w0.2: v3(63.79,48) 63.31,48.48 58.24,48.48 57.23,47.46 57.23,34.66 59.13,32.76 v3(61.3,32.76)
N16834221: length 28.9
  TOP w0.2: U8.3 v3(62.79,47.92) ; R18.1 v3(66.46,32.87)
  BOTTOM w0.2: v3(66.46,32.87) 66,33.34 59.31,33.34 57.76,34.89 57.76,47.28 58.39,47.92 v3(62.79,47.92)
N16834235: length 2.4
  TOP w0.2: U8.6 62.79,43.29 62.94,43.14 63.14,43.14 63.29,43.29 U8.7
N16834244: length 1.8
  TOP w0.2: 61,44.16 61.02,44.16 61.02,44.16
  TOP w0.3: U8.5 61,44.16 61,44.16 R19.2
N16834246: length 3.2
  TOP w0.2: U8.2 63.29,46.32 63.55,46.06 65.08,46.06 65.49,46.47 R17.1
N16861799: length 5.3
  TOP w0.428: R40.1 71.04,35.27 71.05,35.26 D2.1 72.55,35.26 72.82,35.53 CN2.2
N16864731: length 17.3
  TOP w0.5: D3.2 v1(69.04,32.86)
  TOP w0.6: JP3.1 68.68,20.44 68.7,20.43 F2.1 68.7,18.86 69.15,18.41 D4.2
  BOTTOM w0.5: v1(69.04,32.86) 68.68,32.51 68.68,31.1 68.68,31.1 JP3.1
N16868673: length 6.2
  TOP w0.3: SW1.2 60.4,3.44 60.41,3.45 R9.2
N16868745: length 2
  TOP w0.4: R8.2 62.15,3.43 62.63,2.95 D8.1
N16873648: length 7.9
  TOP w0.5: 4.5,25.03 4.51,25.03
  TOP w0.55: 4.51,25.03 C2.2 9.49,25.03 9.5,25.03 R5.2 ; J1.1 4.5,25.03
N16877072: length 5.3
  TOP w0.428: CN2.3 72.84,36.18 72.55,36.47 D1.1 71.05,36.47 71.04,36.46 R41.1

## Copper pours and planes (outline as drawn; the poured copper is in the pictures)
GND on BOTTOM: 1,0.2 0.43,0.43 0.2,1 0.2,49 0.43,49.57 1,49.8 79,49.8 79.57,49.57 79.8,49 79.8,1 79.57,0.43 79,0.2 ; 2 cut-outs
VBAT_IN on BOTTOM: 46.81,19.9 46.81,19.9 44.45,19.9 42.65,21.71 42.65,39.41 43.05,39.82 45.52,39.82 45.92,39.41 45.92,23.71 47.24,22.39 51.08,22.39 51.08,22.4 62.21,22.4 64.08,24.27 64.08,27.8 64.67,28.39 66.39,28.39 66.96,27.83 66.96,22.6 64.26,19.9
N16873648 on TOP: 3.81,25.64 4.85,25.64 5.23,25.26 5.23,24.78 4.85,24.4 3.84,24.4 3.81,24.42
GND on TOP: 1,0.2 0.43,0.43 0.2,1 0.2,13.86 0.2,16.09 0.2,49 0.43,49.57 1,49.8 79,49.8 79.57,49.57 79.8,49 79.8,1 79.57,0.43 79,0.2 ; 1 cut-out

## Text on the board
Ref Des/Silkscreen Bottom: Current_Test
Ref Des/Silkscreen Top: RF_TR | GPIO02 | GPIO00 | RSTN | GPIO03 | GPIO62 | GPIO60 | VDD_FEM | GND | SWD | GPIO07 | SWD_CLK | GPIO06 | SWD_DAT | 3V3 | ASR6601CB_FEM900_TB_V10  2024/03/15
NCLEGEND-1-2: FIGURE | SIZE | 0.2032 | 0.254 | 0.381 | 0.9144 | 3.3 | 0.65 | 0.8x0.5 | 1.4x0.6 | 1.5x0.6 | DRILL CHART: TOP to BOTTOM | ALL UNITS ARE IN MILLIMETERS | TOLERANCE | +0.0762/-0.0762 | +0.0/-0.0 | PLATED | NON-PLATED | QTY | 18 | 40 | 4 | 14 | 2 | 3
